# Allegro board CarteImprimRom.brd
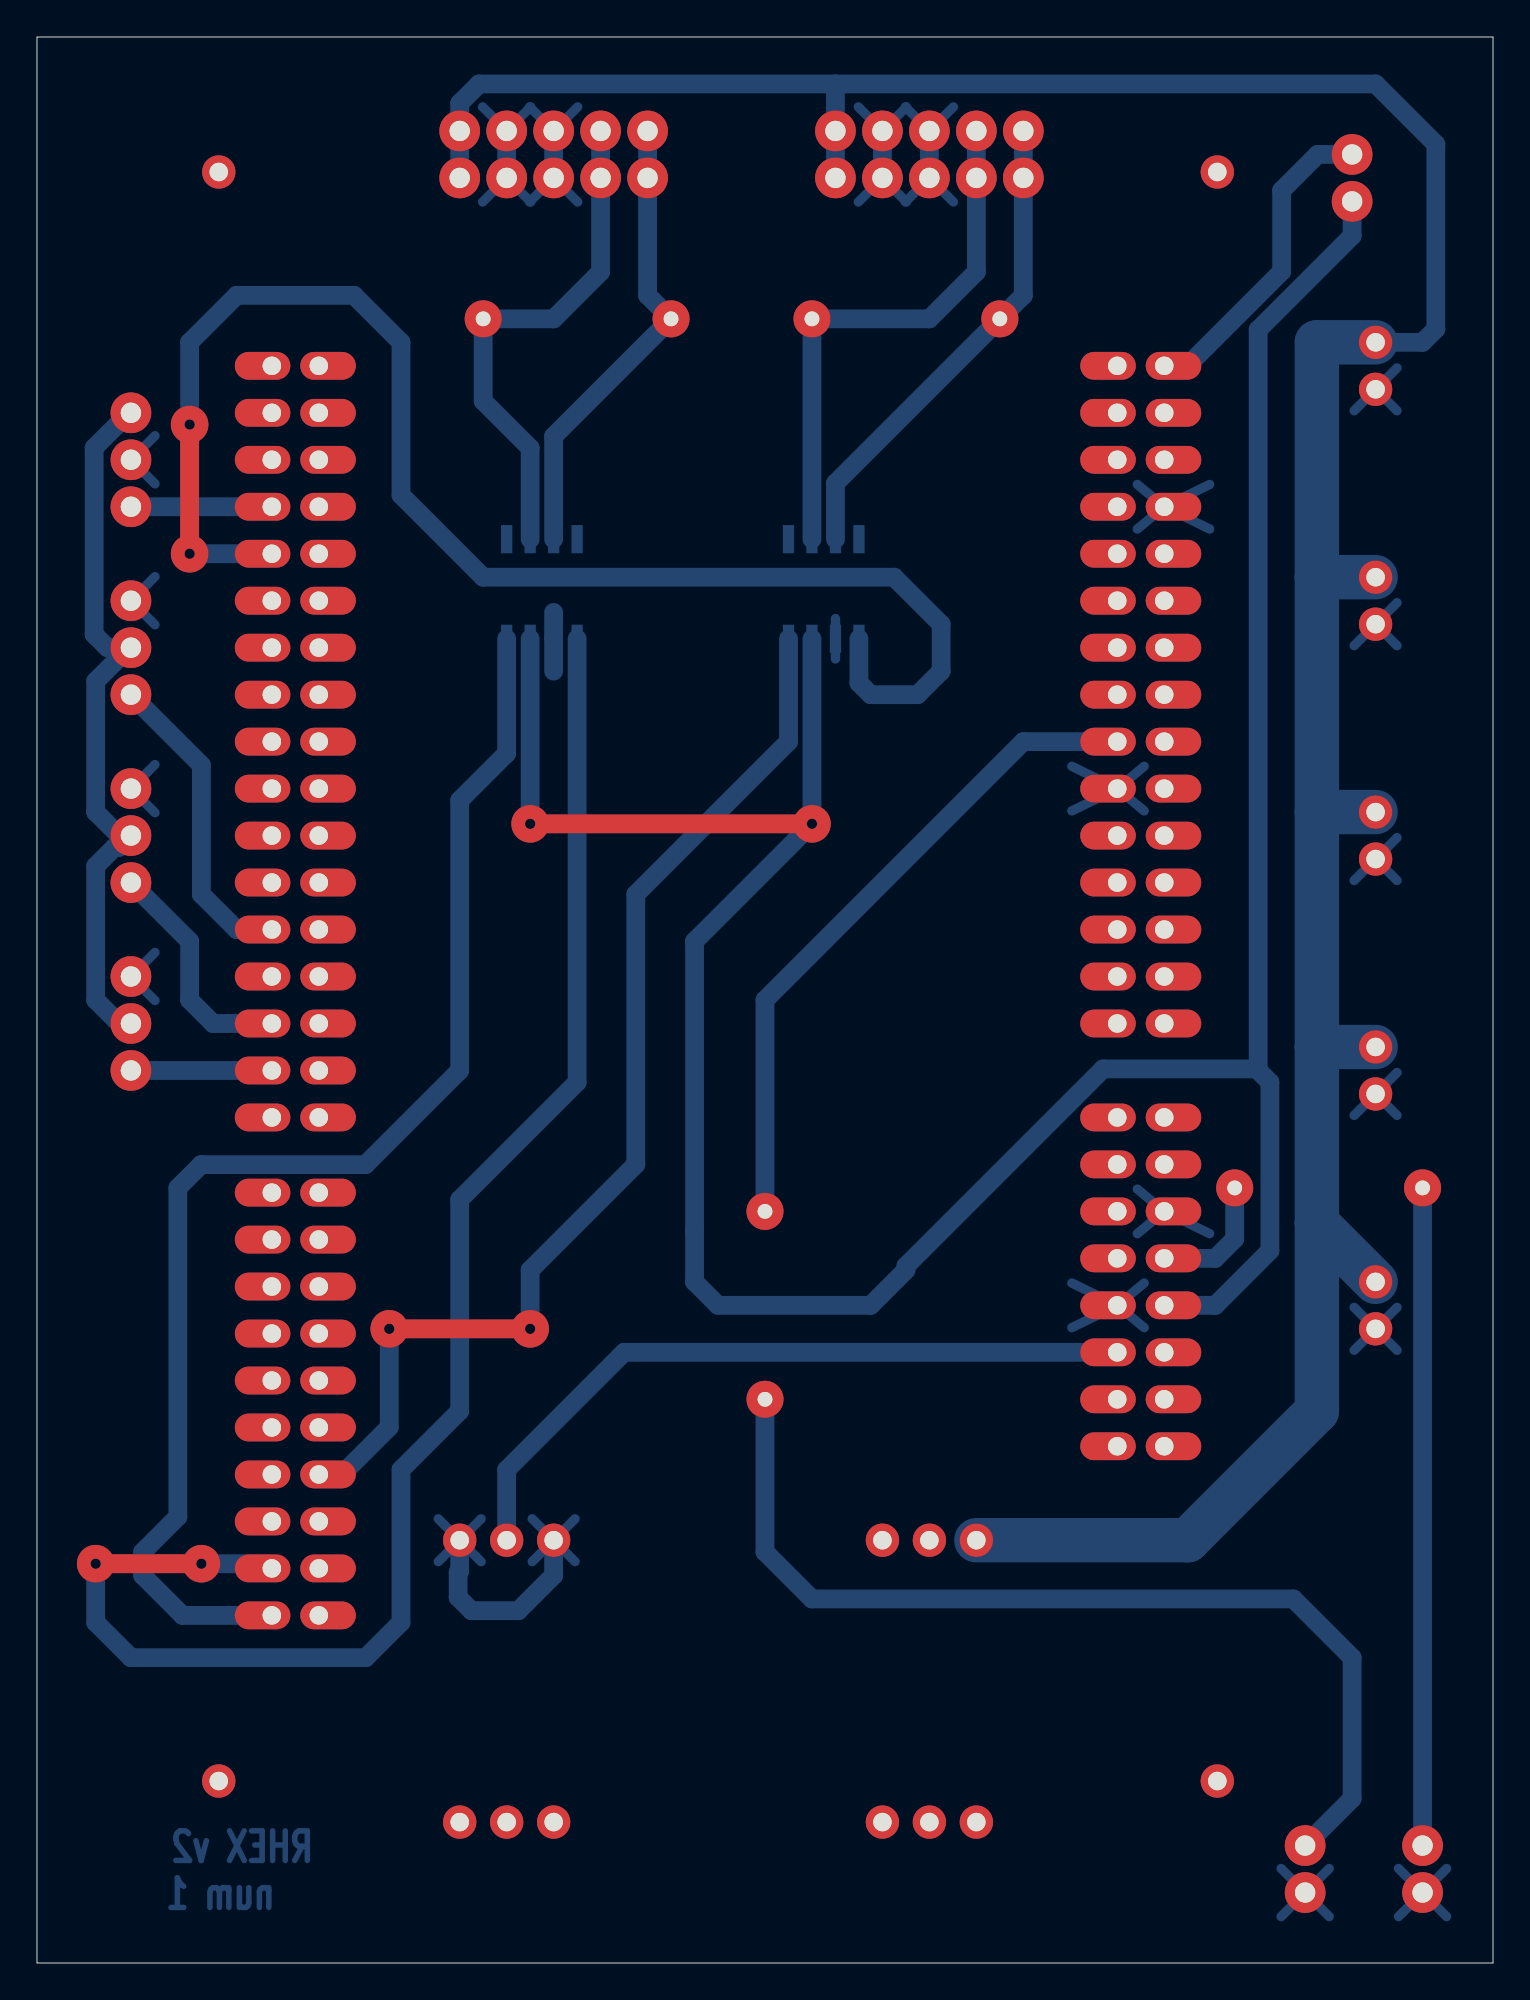
[diagram p0: board, top side]
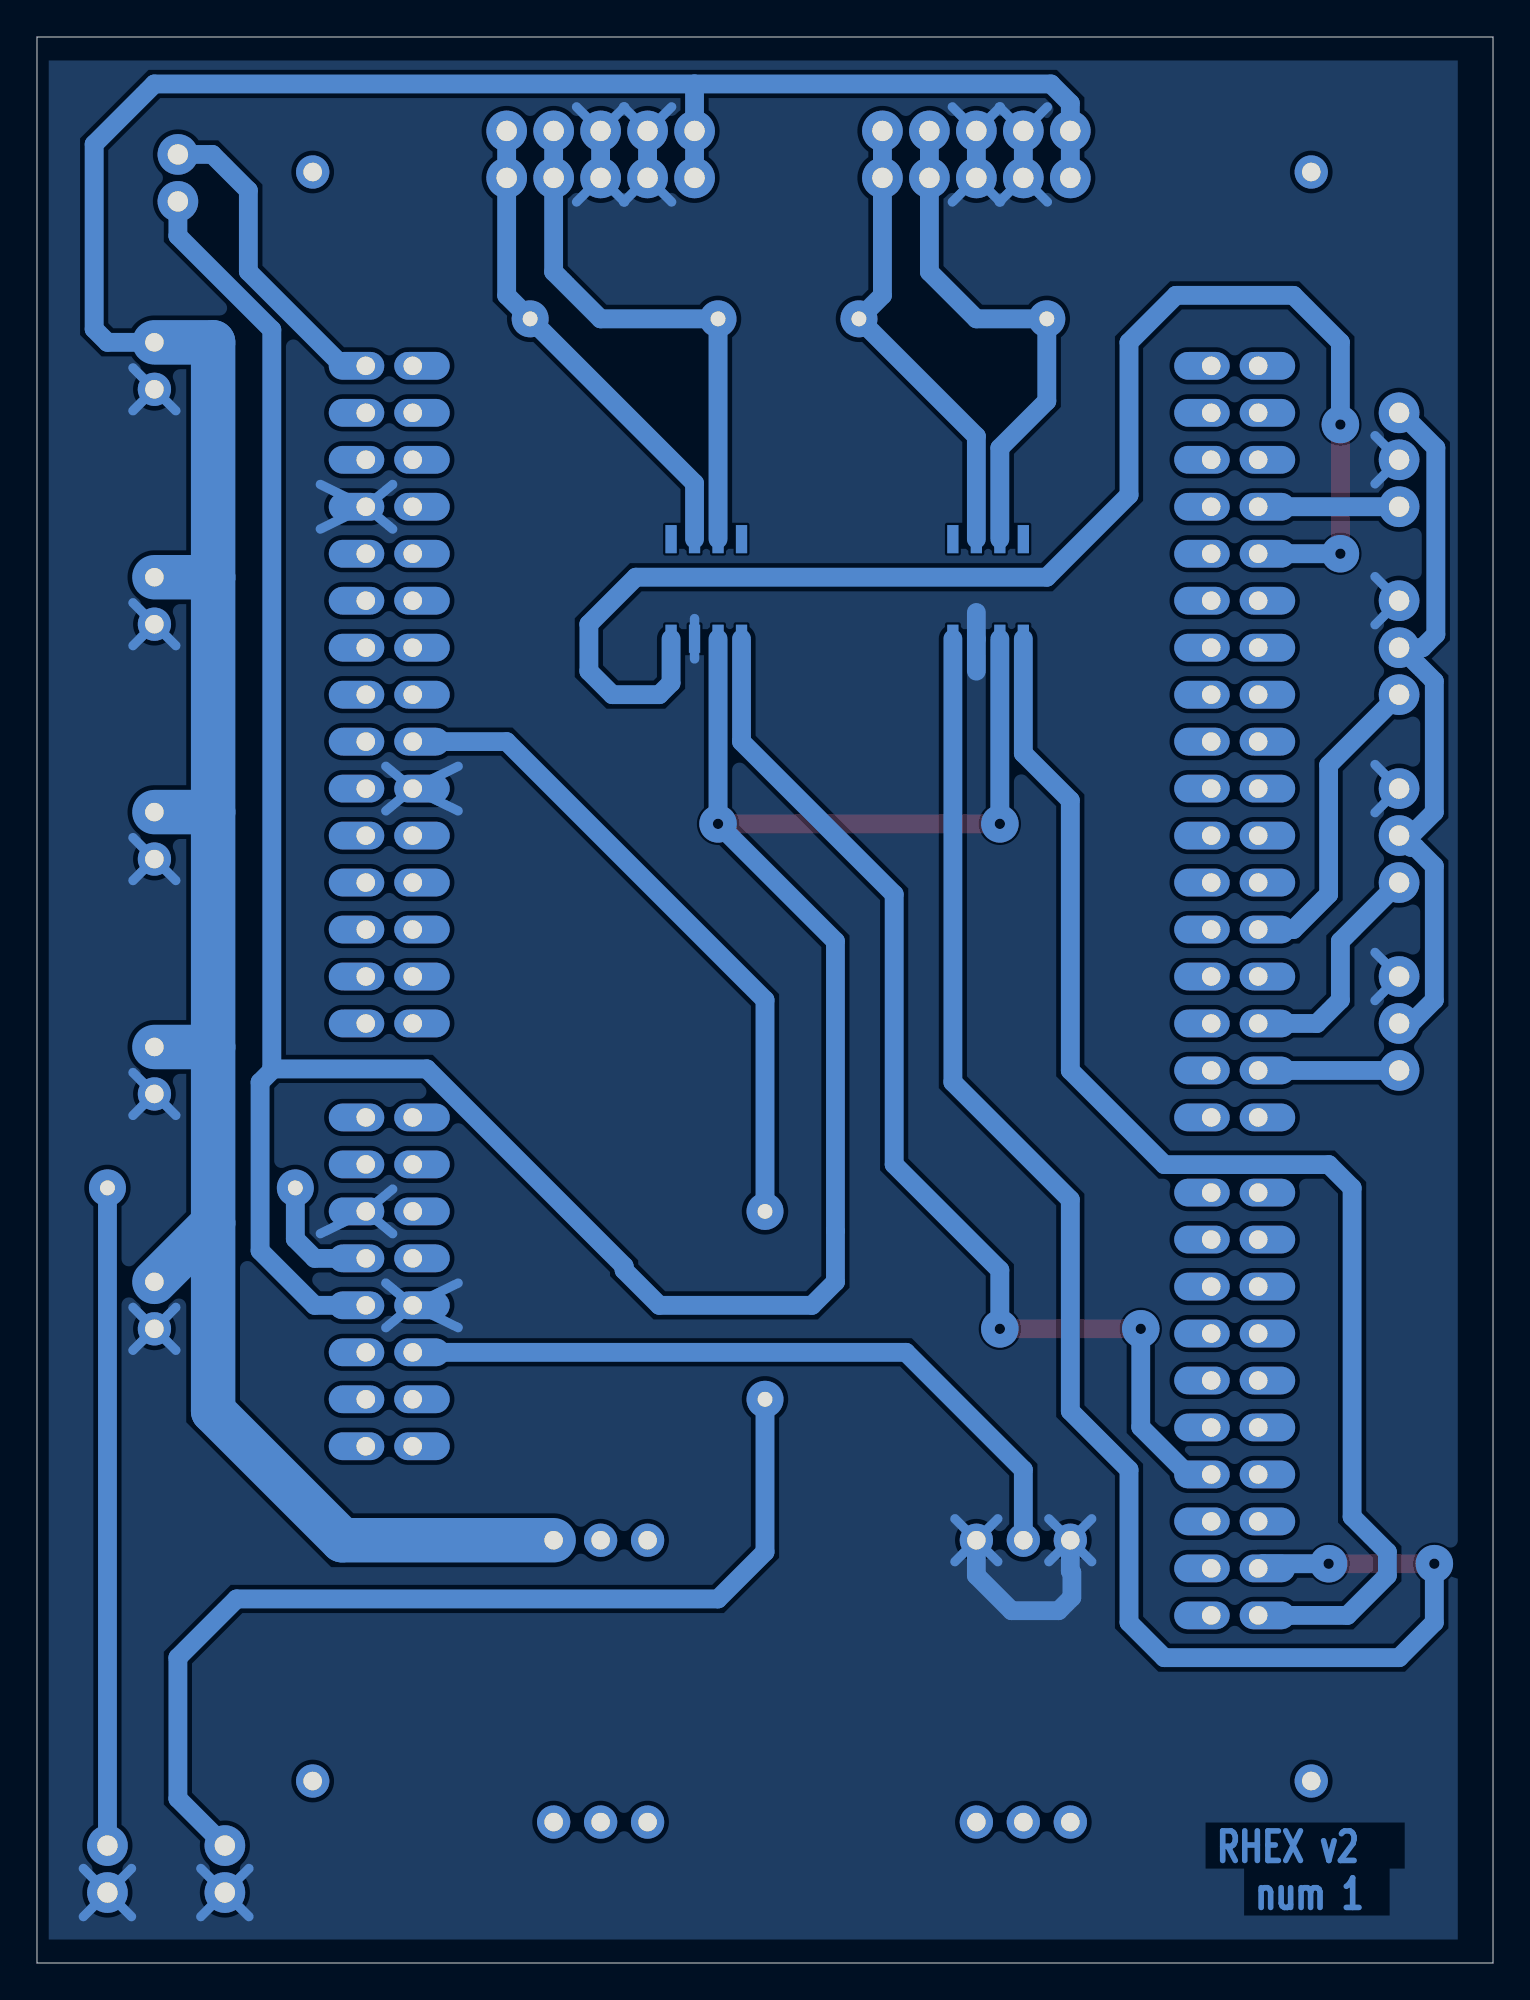
[diagram p1: board, bottom side, seen from below]

Outline 78.74 x 104.14 mm; copper layers: TOP, BOTTOM. Coordinates in mm from the lower left corner of the outline.
Outline path: 0,104.14 0,0 78.74,0 78.74,104.14 0,104.14

## Design rules (mm)
constraint set DEFAULT: min track width 1.016

## Placement (name value [footprint] x y rotation side)
DLED4  D1N4001  [CON_02]  74.93 6.35 180 top
DLED5  D1N4001  [CON_02]  68.58 3.81 0 top
J11  Sortie_1  [CONNECTEUR_2]  72.39 44.45 270 top
J12  Sortie_2  [CONNECTEUR_2]  72.39 57.15 270 top
J13  Sortie_3  [CONNECTEUR_2]  72.39 69.85 270 top
J14  Sortie_4  [CONNECTEUR_2]  72.39 82.55 270 top
J15  Entree_24V  [CONNECTEUR_2]  72.39 95.25 270 top
J17  CON3  [CON_03]  5.08 48.26 0 top
J18  CON3  [CON_03]  5.08 58.42 0 top
J19  CON3  [CON_03]  5.08 68.58 0 top
J20  CON3  [CON_03]  5.08 78.74 0 top
J32  CON2  [CON_02]  71.12 95.25 0 top
J33  CON5  [CON_05]  53.34 96.52 180 top
J34  CON5  [CON_05]  53.34 99.06 180 top
J35  CON5  [CON_05]  33.02 96.52 180 top
J36  CON5  [CON_05]  33.02 99.06 180 top
R3  120  [RES_01]  34.29 88.9 180 top
R4  120  [RES_01]  52.07 88.9 180 top
R5  1k  [RES_01]  64.77 41.91 0 top
R6  1k  [RES_01]  39.37 40.64 270 top
U5  sn69hvd232d  [SN65HVD232D]  29.21 71.6 90 bottom
U6  sn69hvd232d  [SN65HVD232D]  44.45 71.6 90 bottom
U7  nucleo_144_shield  [NUCLEO_144_SHIELD]  60.96 86.36 180 top
U8  Conv_TEL_3-2411  [CONV_TRACO]  43.18 -7.62 270 top
U11  Trou_Drivers  [TROU_DRIVERS]  9.83 9.84 90 top

## Library data of the parts
DLED4 DLED5 = D1N4001
J11-J15 J32 = CON2
J17-J20 = CON3
J33-J36 = CON5
R3-R6 = R
U5 U6 = sn69hvd232d
U7 = nucleo_144_shield
U8 = Conv_TEL_3-2411
U11 = Trou_Drivers

## Footprints (pads in the part's own frame, mm; a bottom-side part is the same pattern mirrored in y, then rotated)
CON_02
  round 2.2 hole 1.1: 1(0,0) 2(0,2.54)
CON_03
  round 2.2 hole 1.1: 1(0,0) 2(0,2.54) 3(0,5.08)
CON_05
  round 2.2 hole 1.1: 1(0,0) 2(2.54,0) 3(5.08,0) 4(7.62,0) 5(10.16,0)
CONNECTEUR_2
  round 1.8 hole 1: 1(7.62,0) 2(10.16,0)
CONV_TRACO
  round 1.8 hole 1: 1(-30.48,7.62) 2(-30.48,5.08) 3(-30.48,2.54) 4(-15.24,7.62) 5(-15.24,5.08) 6(-15.24,2.54) 7(-30.48,-15.24) 8(-30.48,-17.78) 9(-30.48,-20.32) 10(-15.24,-15.24) 11(-15.24,-17.78) 12(-15.24,-20.32)
NUCLEO_144_SHIELD
  oval 3x1.5 hole 1: 1(0,58.42) 2(2.54,58.42) 3(0,55.88) 4(2.54,55.88) 5(0,53.34) 6(2.54,53.34) 7(0,50.8) 8(2.54,50.8) 9(0,48.26) 10(2.54,48.26) 11(0,45.72) 12(2.54,45.72) 13(0,43.18) 14(2.54,43.18) 15(0,40.64) 16(2.54,40.64) 17(0,35.56) 18(2.54,35.56) 19(0,33.02) 20(2.54,33.02) 21(0,30.48) 22(2.54,30.48) 23(0,27.94) 24(2.54,27.94) 25(0,25.4) 26(2.54,25.4) 27(0,22.86) 28(2.54,22.86) 29(0,20.32) 30(2.54,20.32) 31(0,17.78) 32(2.54,17.78) 33(0,15.24) 34(2.54,15.24) 35(0,12.7) 36(2.54,12.7) 37(0,10.16) 38(2.54,10.16) 39(0,7.62) 40(2.54,7.62) 41(0,5.08) 42(2.54,5.08) 43(0,2.54) 44(2.54,2.54) 45(0,0) 46(2.54,0) 47(45.72,67.564) 48(48.26,67.564) 49(45.72,65.024) 50(48.26,65.024) 51(45.72,62.484) 52(48.26,62.484) 53(45.72,59.944) 54(48.26,59.944) 55(45.72,57.404) 56(48.26,57.404) 57(45.72,54.864) 58(48.26,54.864) 59(45.72,52.324) 60(48.26,52.324) 61(45.72,49.784) 62(48.26,49.784) 63(45.72,47.244) 64(48.26,47.244) 65(45.72,44.704) 66(48.26,44.704) 67(45.72,40.64) 68(48.26,40.64) 69(45.72,38.1) 70(48.26,38.1) 71(45.72,35.56) 72(48.26,35.56) 73(45.72,33.02) 74(48.26,33.02) 75(45.72,30.48) 76(48.26,30.48) 77(45.72,27.94) 78(48.26,27.94) 79(45.72,25.4) 80(48.26,25.4) 81(45.72,22.86) 82(48.26,22.86) 83(45.72,20.32) 84(48.26,20.32) 85(45.72,17.78) 86(48.26,17.78) 87(45.72,15.24) 88(48.26,15.24) 89(45.72,12.7) 90(48.26,12.7) 91(45.72,10.16) 92(48.26,10.16) 93(45.72,7.62) 94(48.26,7.62) 95(45.72,5.08) 96(48.26,5.08) 97(45.72,2.54) 98(48.26,2.54) 99(45.72,0) 100(48.26,0)
RES_01
  round 2 hole 0.8: 1(0,0) 2(10.16,0)
SN65HVD232D
  rect 1.524x0.61 smd: 1(0,0) 2(0,-1.27) 3(0,-2.54) 4(0,-3.81) 5(5.385,-3.81) 6(5.385,-2.54) 7(5.385,-1.27) 8(5.385,0)
TROU_DRIVERS
  round 1.8 hole 1: 1(0,0) 2(87,0) 3(0,-54) 4(87,-54)

## Nets
24V_ALIM: J11.1 J12.1 J13.1 J14.1 J15.1 J33.5 J34.5 J35.5 J36.5 U8.1
+3V3: J32.1 U5.3(VCC) U6.3(VCC) U7.7
+5V: R5.1 U7.9
VIN_5V: U7.6 U8.8
0: DLED4.2 DLED5.1 J11.2 J12.2 J13.2 J14.2 J15.2 J17.3 J18.3 J19.3 J20.2 J33.3 J33.4 J34.3 J34.4 J35.3 J35.4 J36.3 J36.4 U5.2 U6.2 U7.8 U7.11 U7.28 U7.39 U8.7 U8.9
CAN1_H: J35.1 J36.1 R3.1 U5.7
CAN1_L: J35.2 J36.2 R3.2 U5.6
CAN1RX_PB8: U5.4 U7.48
CAN1TX_PB9: U5.1 U7.50
CAN2_H: J33.1 J34.1 R4.1 U6.7
CAN2_L: J33.2 J34.2 R4.2 U6.6
CAN2RX: U6.1 U7.92
CAN2RX_PB12: U6.4 U7.53
CH1_PE9: J17.1 U7.70(PE9)
CH2_PE11: J18.1 U7.72
CH3_PE13: J19.1 U7.76
CH4_PE14: J20.1 U7.94
PA4: U7.63
PA5: U7.56
PA6: U7.58
PA7: U7.60
N37109: J17.2 J18.2 J19.2 J20.3
N67760: R6.1 U7.30
N74665: J32.2 U7.45
N676480: DLED4.1 R5.2
N677520: DLED5.2 R6.2

Pads without a net: U5 5 8; U6 5 8; U7 1 2 3 4 5 10 12 13 14 15 16 17 18 19 20 21 22 23 24 25 26 27 29 31 32 33 34 35 36 37 38 40 41 42 43 44 46 47 49 51 52 54 55 57 59 61 62 64 65 66 67 68 69 71 73 74 75 77 78 79 80 81 82 83 84 85 86 87 88 89 90 91 93 95 96 97 98 99 100; U8 2 3 4 5 6 10 11 12; U11 1 2 3 4

## Via types
v1: diameter 2.032, hole 0.559, TOP to BOTTOM, 8 vias

## Routing (per net, layer and track width the routed paths; a pad name or vN(x,y) marks a point on that pad's centre or on a via; arc(x,y) is an arc through that point)
24V_ALIM: length 173.5
  BOTTOM w1.016: J35.5 J36.5 22.86,100.55 23.91,101.6 43.18,101.6 ; 43.18,101.6 J34.5 J33.5 ; 43.18,101.6 72.39,101.6 75.65,98.34 75.65,88.35 74.93,87.63 J15.1
  BOTTOM w2.4: 69.22,62.23 69.22,74.93 ; 69.22,62.23 69.22,49.53 ; 69.22,62.23 J13.1 ; 69.22,74.93 69.22,87.63 J15.1 ; 69.22,74.93 J14.1 ; J11.1 69.22,40 ; 69.22,40 69.22,49.53 ; 69.22,40 69.22,29.84 62.23,22.86 U8.1 ; 69.22,49.53 J12.1
+3V3: length 165.1
  TOP w1.016: v1(26.67,61.59) v1(41.91,61.59)
  BOTTOM w1.016: U6.3 v1(41.91,61.59) 35.56,55.25 35.56,39.58 35.56,39.58 35.56,36.83 36.83,35.56 45.08,35.56 46.99,37.46 46.99,37.68 57.66,48.34 65.96,48.34 ; U7.7 63.72,35.56 66.67,38.51 66.67,47.62 65.96,48.34 ; U5.3 v1(26.67,61.59) ; 65.96,48.34 66.04,48.43 66.04,88.31 71.12,93.39 J32.1
+5V: length 7
  BOTTOM w1.016: R5.1 64.77,39.15 63.72,38.1 U7.9
VIN_5V: length 39.5
  BOTTOM w1.016: U8.8 25.4,26.67 31.75,33.02 U7.6
0: length 159.1
  BOTTOM w0.508: 49.56,95.22 J33.3 46.96,95.22 ; 6.38,62.2 J18.3 6.38,64.8 ; 26.7,95.22 J35.4 24.1,95.22 ; 59.51,41.84 U7.11 ; U7.11 63.41,39.44 ; U7.11 59.51,39.44 ; 21.7,21.7 U8.9 ; U8.9 24.02,21.7 ; U8.9 24.02,24.02 ; U8.9 21.7,24.02 ; 26.64,95.22 J35.3 29.24,95.22 ; 67.28,5.11 DLED5.1 ; DLED5.1 69.88,2.51 ; DLED5.1 69.88,5.11 ; DLED5.1 67.28,2.51 ; U7.39 63.41,79.94 ; U7.39 59.51,77.54 ; U7.39 59.51,79.94 ; U7.39 63.41,77.54 ; U7.28 59.87,62.3 ; U7.28 55.97,62.3 ; U7.28 59.87,64.7 ; U7.28 55.97,64.7 ; 26.78,24.02 U8.7 ; U8.7 29.1,21.7 ; U8.7 26.78,21.7 ; U8.7 29.1,24.02 ; 49.56,100.36 J34.3 46.96,100.36 ; 6.38,74.96 J19.3 6.38,72.36 ; J12.2 73.55,45.83 ; J12.2 73.55,48.15 ; J12.2 71.23,45.83 ; J11.2 73.55,33.13 ; J11.2 71.23,35.45 ; J11.2 73.55,35.45 ; J11.2 71.23,33.13 ; J13.2 73.55,58.53 ; J13.2 71.23,58.53 ; J13.2 73.55,60.85 ; DLED4.2 76.23,5.11 ; DLED4.2 76.23,2.51 ; DLED4.2 73.63,2.51 ; DLED4.2 73.63,5.11 ; J15.2 73.55,83.93 ; J15.2 71.23,83.93 ; J15.2 73.55,86.25 ; 6.38,82.58 J20.2 6.38,79.98 ; 47.02,95.22 J33.4 44.42,95.22 ; J14.2 73.55,71.23 ; J14.2 73.55,73.55 ; J14.2 71.23,71.23 ; 26.64,100.36 J36.3 29.24,100.36 ; U7.8 59.87,34.36 ; U7.8 55.97,34.36 ; U7.8 55.97,36.76 ; U7.8 59.87,36.76 ; 43.18,72.69 U6.2 43.18,70.51 ; 6.38,54.64 J17.3 6.38,52.04 ; 24.1,100.36 J36.4 26.7,100.36 ; 47.02,100.36 J34.4 44.42,100.36
  BOTTOM w1.016: J34.3 J33.3 ; 27.94,69.85 U5.2 27.94,73.03 ; U8.7 27.94,20.95 26.04,19.05 23.5,19.05 22.78,19.77 22.78,21.11 22.86,21.2 U8.9 ; J34.4 J33.4 ; J36.4 J35.4 ; J36.3 J35.3
CAN1_H: length 25.2
  BOTTOM w1.016: U5.7 27.94,82.55 R3.1 33.02,90.17 J35.1 J36.1
CAN1_L: length 28
  BOTTOM w1.016: J36.2 J35.2 30.48,91.44 27.94,88.9 R3.2 24.13,84.45 26.67,81.92 U5.6
CAN1RX_PB8: length 71.9
  BOTTOM w1.016: U7.48 7.87,18.8 5.71,20.95 5.71,22.23 7.62,24.13 7.62,41.91 8.88,43.17 17.77,43.17 22.86,48.26 22.86,62.87 25.4,65.41 U5.4
CAN1TX_PB9: length 88
  TOP w1.016: v1(3.18,21.59) v1(8.89,21.59)
  BOTTOM w1.016: v1(3.18,21.59) 3.18,18.41 5.08,16.51 17.78,16.51 19.68,18.41 19.68,26.67 22.86,29.84 22.86,41.27 29.21,47.62 U5.1 ; U7.50 12.45,21.59 v1(8.89,21.59)
CAN2_H: length 26.3
  BOTTOM w1.016: J34.1 J33.1 53.34,90.17 R4.1 43.18,80.01 U6.7
CAN2_L: length 29.5
  BOTTOM w1.016: U6.6 R4.2 48.26,88.9 50.8,91.44 J33.2 J34.2
CAN2RX: length 79.9
  TOP w1.016: v1(8.25,76.2) v1(8.25,83.19)
  BOTTOM w1.016: v1(8.25,83.19) 8.25,87.63 10.79,90.17 17.14,90.17 19.68,87.63 19.68,79.38 24.13,74.93 46.36,74.93 48.89,72.39 48.89,69.85 47.62,68.58 45.08,68.58 44.45,69.22 U6.1 ; U7.92 v1(8.25,76.2)
CAN2RX_PB12: length 60.9
  TOP w1.016: v1(19.05,34.29) v1(26.67,34.29)
  BOTTOM w1.016: U7.53 16.49,26.42 19.05,28.98 v1(19.05,34.29) ; v1(26.67,34.29) 26.67,37.46 32.38,43.18 32.38,57.78 40.64,66.04 U6.4
CH1_PE9: length 7.6
  BOTTOM w1.016: J17.1 U7.70
CH2_PE11: length 12.6
  BOTTOM w1.016: J18.1 8.25,55.24 8.25,52.07 9.52,50.8 U7.72
CH3_PE13: length 17
  BOTTOM w1.016: J19.1 8.89,64.77 8.89,57.79 10.79,55.88 U7.76
CH4_PE14: length 7.6
  BOTTOM w1.016: J20.1 U7.94
N37109: length 39.5
  BOTTOM w1.016: 4.99,71.12 3.18,69.31 3.18,62.23 4.45,60.96 J18.2 4.45,60.32 4.19,60.32 3.18,59.31 3.18,52.07 4.45,50.8 J17.2 ; 4.99,71.12 J19.2 ; 4.99,71.12 3.81,71.12 3.09,71.84 3.09,81.92 4.99,83.82 J20.3
N67760: length 36.3
  BOTTOM w1.016: U7.30 53.34,66.04 39.37,52.07 R6.1
N74665: length 17.5
  BOTTOM w1.016: U7.45 62.21,86.36 67.31,91.46 67.31,95.84 69.26,97.79 J32.2
N676480: length 35.6
  BOTTOM w1.016: R5.2 DLED4.1
N677520: length 53.6
  BOTTOM w1.016: DLED5.2 71.12,8.89 71.12,16.51 67.95,19.68 41.91,19.68 39.37,22.23 R6.2

## Copper pours and planes (outline as drawn; the poured copper is in the pictures)
0 on BOTTOM: 1.9,102.87 1.9,1.27 78.11,1.27 78.11,102.87

## Text on the board
BOTTOM: num 1 | RHEX v2
